# Altium PCB PCB1.PcbDoc
Units mm, origin at the board's own origin, x right, y up, seen from the top; angles counter-clockwise.
Board outline 15.24 x 7.62 mm, 2 copper layers (Top Layer, Bottom Layer); 8 components, 6 nets, 21 pads, 4 vias.
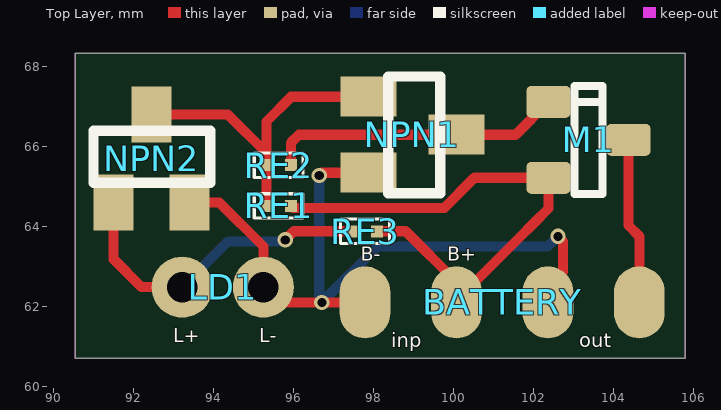
[diagram p0: Top Layer view]
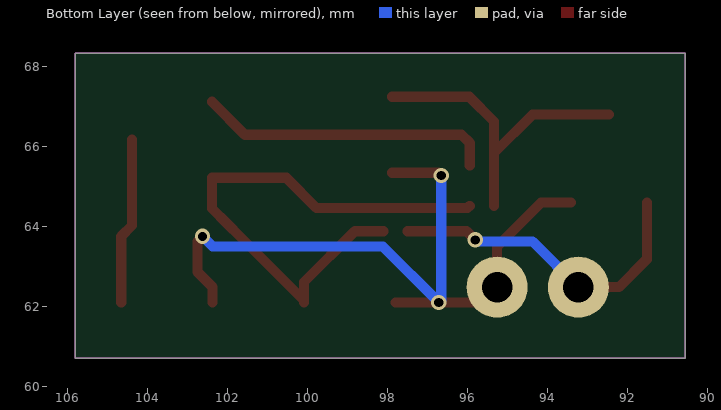
[diagram p1: Bottom Layer view, seen from below]

## Layer stack, top to bottom
Top Solder: solder mask 0.0102, Solder Resist, Dk 3.5
Top Layer: signal copper 0.0356
Dielectric 1: dielectric 0.32, FR-4, Dk 4.8
Bottom Layer: signal copper 0.0356
Bottom Solder: solder mask 0.0102, Solder Resist, Dk 3.5

## Board outline
90.551,60.706 105.791,60.706 105.791,68.326 90.551,68.326

## Design rules (kind name [scope] priority, off if disabled: settings)
Clearance [All] p1: gap=0.254 ignorepadtopadclearanceinfootprint=FALSE except(0: Arc-Hole Track-Hole SMDPad-Hole THPad-Hole Via-Hole Fill-Hole Poly-Hole Region-Hole Text-Hole)
PolygonConnect [All] p1: connectstyle=Relief reliefconductorwidth=0.254 reliefentries=4 polygonreliefangle="90 Angle" airgapwidth=0.254
RoutingVias [All] p1: holewidth=0.711 width=1.27 viastyle="Through Hole" minholewidth=0.711 minwidth=1.27 maxholewidth=0.711 maxwidth=1.27
SolderMaskExpansion [All] p1: expansion=0.102 istentingtop=FALSE
Width [All] p1: maxlimit=0.254 minlimit=0.254 preferedwidth=0.254
30 further rules are at their usual default settings.

## Components (designator, comment, footprint, x,y, rotation, side; value= is the part's Value field where it differs from the comment)
BATTERY "BATTERY" "header 1" 101.219,62.103 r0 top
LD1 "LDR" LDR 94.234,62.484 r0 top
M1 "MOSFET" SOT23(1) 103.378,66.167 r270 top
NPN1 "3904" TO92127P495H495-3 97.622,63.053 r270 top
NPN2 "3904" TO92127P495H495-3 95.697,64.348 r0 top
RE1 "RES" RESISTOR 95.631,64.516 r180 top
RE2 "RES" RESISTOR 95.631,65.532 r180 top
RE3 "RES" RESISTOR 97.79,63.881 r180 top

## Footprints (in the part's own frame and the unit in brackets; to place one, negate y for a bottom-side part, rotate by r counter-clockwise, add the part's x,y. Pads: shape width x height; smd on the part's side, far side on the other; paste and mask are expansions set on the pad)
"header 1" [mm]
  oval 1.27x1.8 smd: 1(-3.429,0) 2(-1.143,0) 3(1.143,0) D(3.429,0)
LDR [mil]
  round 60 hole 30: 1(-40,0) 2(40,0)
RESISTOR [mm]
  rect 0.3x0.3 smd: 1(-0.305,0) 2(0.305,0)
  silkscreen extent -0.61,-0.3 0.61,0.3
SOT23(1) [mm]
  rrect30% 0.8x1.1 smd: 1(-0.95,-1) 2(0.95,-1) 3(0,1)
  silkscreen extent -1.35,-0.35 1.35,0.35
TO92127P495H495-3 [mm]
  rect 1x1.4 smd: 1(-4.191,0.254) 2(-2.291,0.254) 3(-3.241,2.454)
  silkscreen extent -4.7,0.75 -1.78,2.05

## Part data
BATTERY: library part "BI 6V"
M1: library part "2300 MOSFET", "2300 MOSFET"
NPN1 NPN2: library part NPN, "NPN 3904"
RE1 RE2 RE3: library part RESISTNACE

## Via types
v1: diameter 0.381, hole 0.229, Top Layer to Bottom Layer, tented both sides, 4 vias

## Nets (pads, with @x,y where several pads share a name; then routed paths per layer and width w, separated by ;. In a path a pad name is that pad's centre, name@x,y a point inside that pad or via, vN(x,y) a via of type N, cw(c..) or ccw(c..) an arc to the next point about the centre after c; other vN are vias at no path point)
NetBATTERY_1: BATTERY.1 BATTERY.3 LD1.2 NPN1.2 NPN2.2 | length 18.9
  Top Layer w0.254: NPN2.2 94.148,64.602 95.25,63.5 LD1.2 95.631,62.103 v1(96.71,62.103) BATTERY.1 ; v1(96.647,65.278) 96.713,65.344 NPN1.2 ; BATTERY.3 102.362,62.484 102.743,62.865 102.743,63.627 v1(102.616,63.754)
  Bottom Layer w0.254: v1(96.647,65.278) 96.647,62.166 v1(96.71,62.103) 98.108,63.5 100.838,63.5 102.362,63.5 v1(102.616,63.754)
NetBATTERY_2: BATTERY.2 M1.2 RE1.1 RE3.1 | length 13.8
  Top Layer w0.254: RE1.1 95.989,64.463 97.018,64.463 98.734,64.463 99.769,64.463 100.523,65.217 M1.2 102.378,64.451 101.998,64.072 101.663,63.737 BATTERY.2@100.076,62.149 ; RE3.1 98.806,63.881 100.076,62.611 BATTERY.2
NetBATTERY_D: BATTERY.D M1.3 | length 4.2
  Top Layer w0.254: M1.3 104.378,64.024 104.648,63.754 BATTERY.D
NetLD1_1: LD1.1 NPN2.1 RE3.2 | length 8.5
  Top Layer w0.254: NPN2.1 91.506,63.18 92.202,62.484 LD1.1 LD1.1@93.218,62.23 ; v1(95.797,63.666) 96.012,63.881 RE3.2
  Bottom Layer w0.254: LD1.1 94.361,63.627 95.758,63.627 v1(95.797,63.666)
NetM1_1: M1.1 NPN1.3 RE2.1 | length 7.4
  Top Layer w0.254: RE2.1 95.936,66.091 96.139,66.294 NPN1.3 101.346,66.294 101.555,66.294 M1.1
NetNPN1_1: NPN1.1 NPN2.3 RE1.2 RE2.2 | length 8.2
  Top Layer w0.254: NPN2.3 94.361,66.802 95.326,65.837 ; RE1.2 RE2.2 95.326,65.837 ; NPN1.1 95.946,67.244 95.326,66.624 95.326,65.837

## Keep-outs
Keep-Out Layer:
  the board outline again, w0.001

## Silkscreen, mask and mechanical layers (free items; w line width, h text height)
Top Overlay:
  text "B-" at 97.688,63.144 h0.35
  text "B+" at 99.847,63.144 h0.35
  text "L+" at 92.989,61.112 h0.35
  text "L-" at 95.148,61.112 h0.35
  text "inp" at 98.45,60.976 h0.35
  text "out" at 103.149,60.985 h0.35